# EAGLE board Main Board_backup (EAGLE 9.3.1)
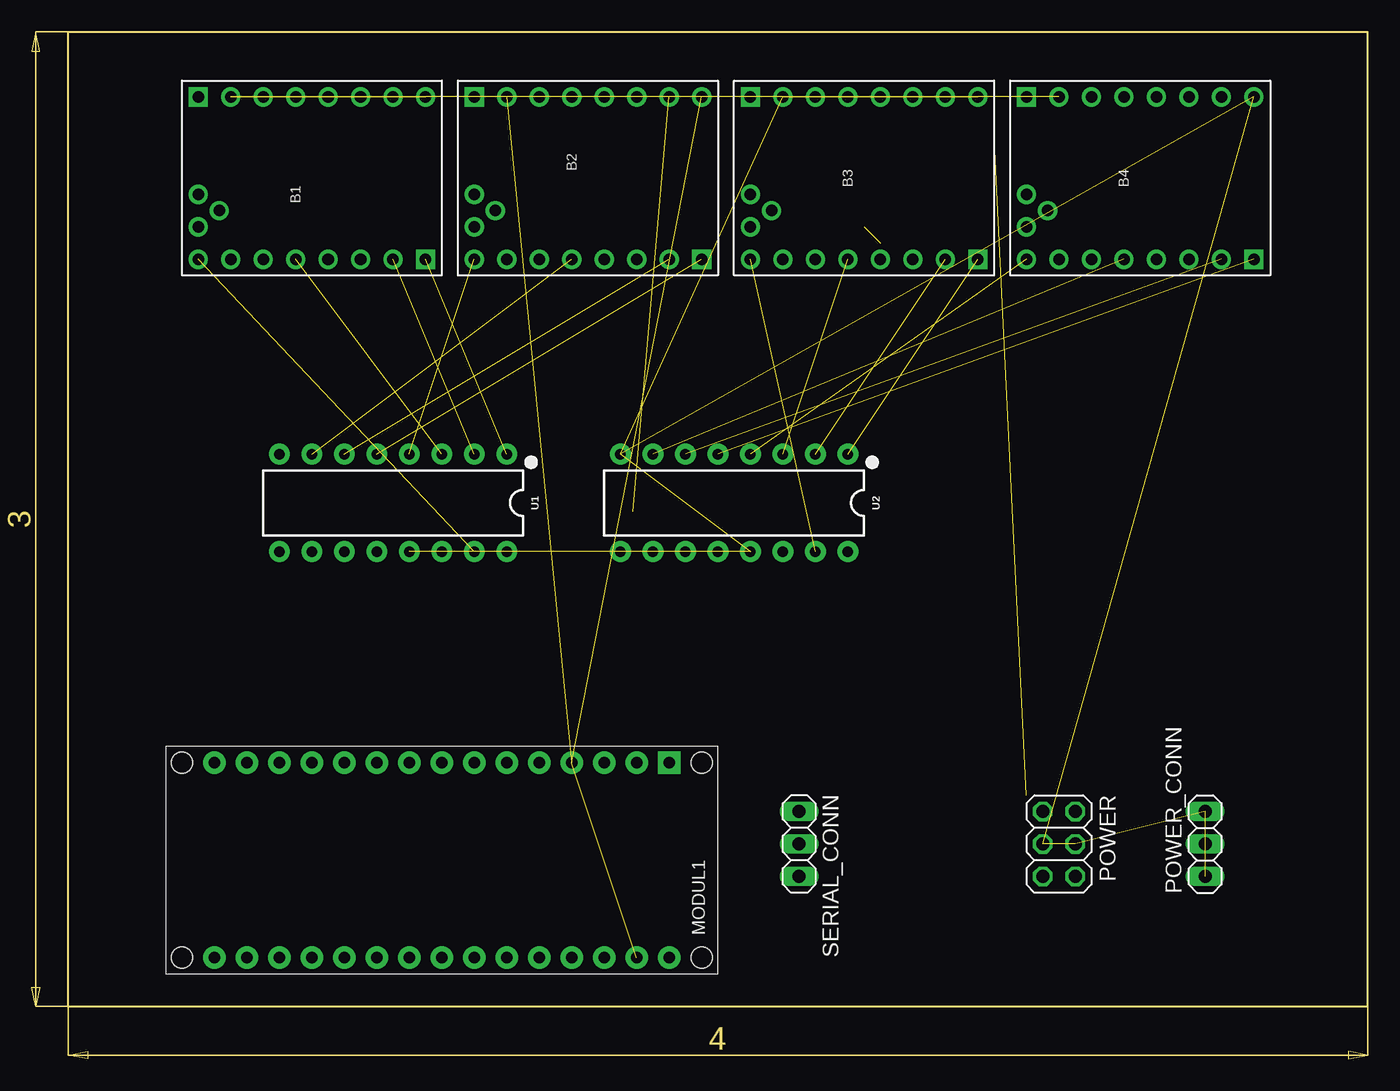
[diagram p0: board, top side]
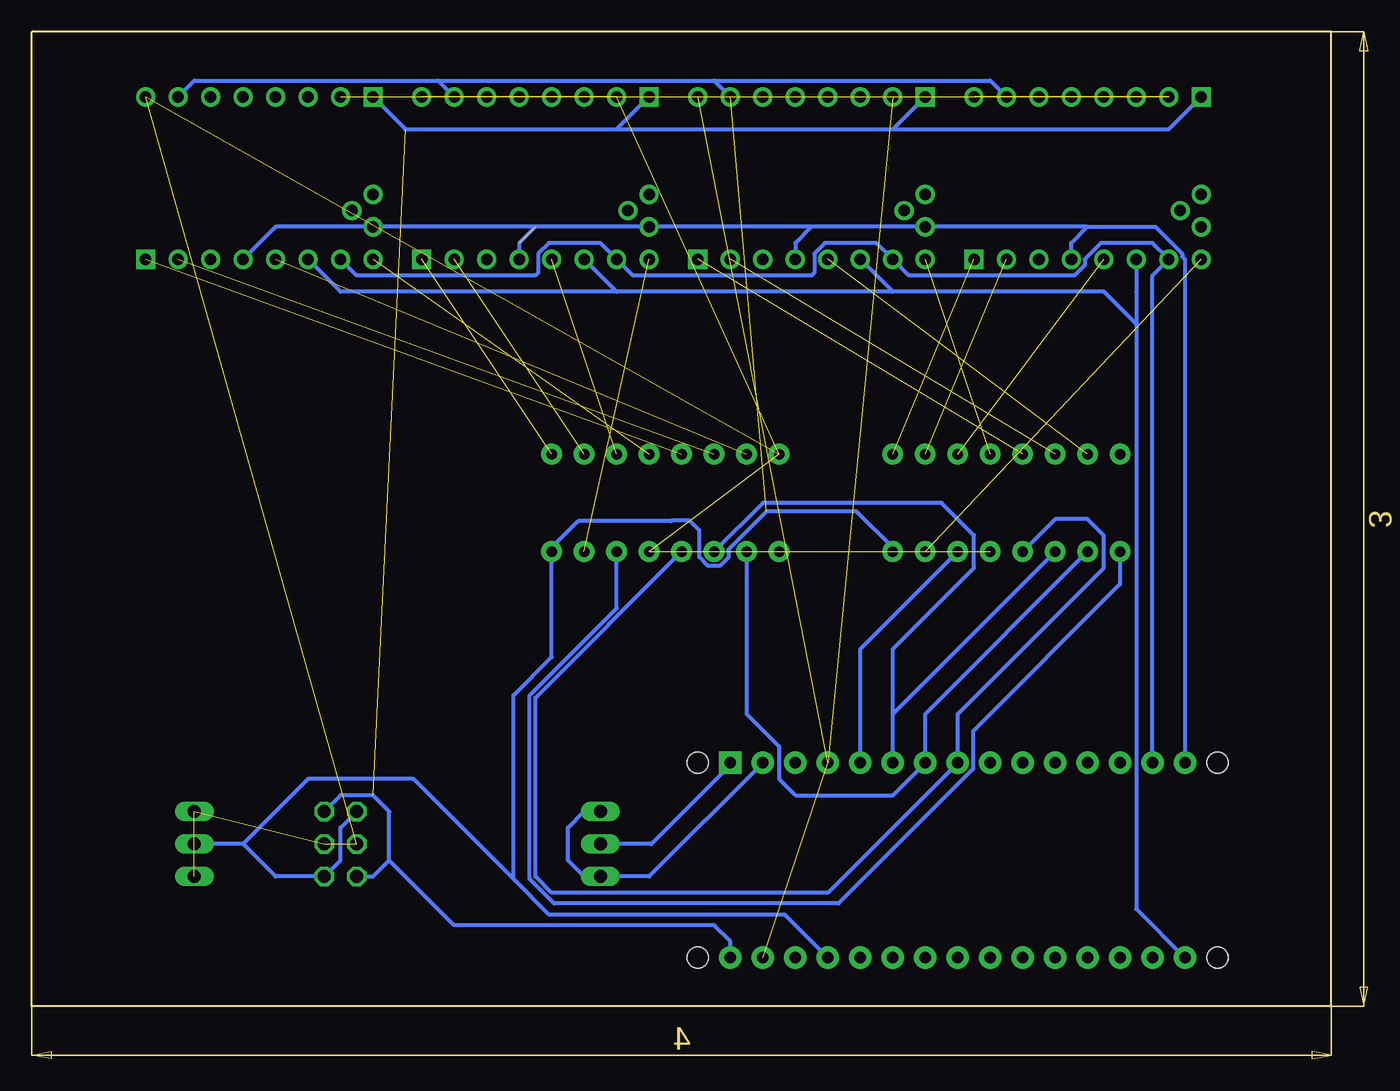
[diagram p1: board, bottom side, seen from below]

Size 101.6 x 76.2 mm. Coordinates in mm from the lower left corner, seen from the top.
Outline: 0,0 101.6,0 101.6,76.2 0,76.2 0,0
Copper layers (1*16): Top 0.035mm / dielectric 1.5mm / Bottom 0.035mm
Design rules "default": minimum track width 6mil, minimum drill 0.35mm, track to track 6mil, track to pad 6mil, pad to pad 6mil, via to via 6mil, smd to smd 6mil, copper to edge 40mil, drill to drill 6mil, minimum pad ring 10mil, minimum via ring 8mil, stop-mask expansion 4mil, vias tented up to drill 0mil, thermal gap 10mil

## Footprints (pad centres in the part's own frame; a part is rotated, then mirrored left to right if it is on the bottom)
STEPSTICK_TP = drill 0.9 pad 1.5: CFG1 -6.35,6.35; CFG2 -6.35,3.81; CFG3 -6.35,1.27; DIAG0 -2.54,7.239; DIAG1 -1.27,8.89; EN -6.35,8.89; GND@1 6.35,6.35; GND@2 6.35,-8.89; M1A 6.35,-1.27; M1B 6.35,-3.81; M2A 6.35,1.27; M2B 6.35,3.81; NC -6.35,-3.81; NC/CFG0 -6.35,-1.27; STEP -6.35,-6.35; VIO 6.35,-6.35; VREF -3.81,8.89 | drill 0.9 pad 1.5 square: DIR -6.35,-8.89; VM 6.35,8.89
ARDUINO_NANO2 = drill 0.914 pad 1.778 square: J1.1 -7.62,17.78 | drill 0.914 pad 1.778: J1.2 -7.62,15.24; J1.3 -7.62,12.7; J1.4 -7.62,10.16; J1.5 -7.62,7.62; J1.6 -7.62,5.08; J1.7 -7.62,2.54; J1.8 -7.62,0; J1.9 -7.62,-2.54; J1.10 -7.62,-5.08; J1.11 -7.62,-7.62; J1.12 -7.62,-10.16; J1.13 -7.62,-12.7; J1.14 -7.62,-15.24; J1.15 -7.62,-17.78; J2.1 7.62,17.78; J2.2 7.62,15.24; J2.3 7.62,12.7; J2.4 7.62,10.16; J2.5 7.62,7.62; J2.6 7.62,5.08; J2.7 7.62,2.54; J2.8 7.62,0; J2.9 7.62,-2.54; J2.10 7.62,-5.08; J2.11 7.62,-7.62; J2.12 7.62,-10.16; J2.13 7.62,-12.7; J2.14 7.62,-15.24; J2.15 7.62,-17.78 | hole 1.651: -7.62,-20.32; 7.62,-20.32; 7.62,20.32; -7.62,20.32
2X03 = drill 1.016 octagon: 1 -2.54,-1.27; 2 -2.54,1.27; 3 0,-1.27; 4 0,1.27; 5 2.54,-1.27; 6 2.54,1.27
1X03 = drill 1.016 long: 1 -2.54,0; 2 0,0; 3 2.54,0
DIP16 = drill 0.813 pad 1.626: 1 -8.89,-3.81; 2 -6.35,-3.81; 3 -3.81,-3.81; 4 -1.27,-3.81; 5 1.27,-3.81; 6 3.81,-3.81; 7 6.35,-3.81; 8 8.89,-3.81; 9 8.89,3.81; 10 6.35,3.81; 11 3.81,3.81; 12 1.27,3.81; 13 -1.27,3.81; 14 -3.81,3.81; 15 -6.35,3.81; 16 -8.89,3.81

## Placement (x,y rotation side)
B1  STEPSTICK-TP  [STEPSTICK_TP]  19.05,64.77 90 top
B2  STEPSTICK-TP  [STEPSTICK_TP]  40.64,64.77 90 top
B3  STEPSTICK-TP  [STEPSTICK_TP]  62.23,64.77 90 top
B4  STEPSTICK-TP  [STEPSTICK_TP]  83.82,64.77 90 top
MODUL1  ARDUINO_NANO2  [ARDUINO_NANO2]  29.21,11.43 270 top
POWER  [2X03]  77.47,12.7 270 top
POWER_CONN  [1X03]  88.9,12.7 90 top
SERIAL_CONN  [1X03]  57.15,12.7 270 top
U1  SN74HC595N  [DIP16]  25.4,39.37 180 top
U2  SN74HC595N  [DIP16]  52.07,39.37 180 top

## Library data of the parts
B1-B4 = we-board
MODUL1 = arduinoNano; ANZAHL: 2; MODUL: TRUE; STECKX0: -76200; STECKX1: 76200; STECKY0: 177800; STECKY1: 177800
POWER POWER_CONN SERIAL_CONN = pinhead
U1 U2 = SparkFun-IC-Logic; PROD_ID: IC-13123

## Nets
3V3: MODUL1.J2.14
+5V: B1.VIO B2.VIO B3.VIO B4.VIO MODUL1.J2.4 POWER.1 POWER.6 POWER_CONN.2 U1.16 U2.16
+12V: B1.VM B2.VM B3.VM B4.VM MODUL1.J2.1 POWER.2 POWER.5
AREF: MODUL1.J2.13
GND: B1.GND@1 B1.GND@2 B2.GND@1 B2.GND@2 B3.GND@1 B3.GND@2 B4.GND@1 B4.GND@2 MODUL1.J1.4 MODUL1.J2.2 POWER.3 POWER.4 POWER_CONN.1 POWER_CONN.3 U1.8 U1.13 U2.8 U2.13
MISO: B1.NC/CFG0 B2.NC/CFG0 B3.NC/CFG0 B4.NC/CFG0 MODUL1.J1.15
MOSI: B1.CFG1 B2.CFG1 B3.CFG1 B4.CFG1 MODUL1.J1.14
N$1: MODUL1.J1.1 SERIAL_CONN.2
N$2: U1.9 U2.14
N$3: B2.CFG3 U1.7
N$4: B2.STEP U1.6
N$5: B2.DIR U1.5
N$6: B2.EN U1.4
N$7: B1.CFG3 U1.3
N$8: B1.STEP U1.2
N$9: B1.DIR U1.1
N$10: B1.EN U1.15
N$11: B4.CFG3 U2.7
N$12: B4.STEP U2.6
N$13: B4.DIR U2.5
N$14: B4.EN U2.4
N$15: B3.CFG3 U2.3
N$16: B3.STEP U2.2
N$17: B3.DIR U2.1
N$18: B3.EN U2.15
N$22: MODUL1.J1.5 U1.14
N$27: MODUL1.J1.2 SERIAL_CONN.1 SERIAL_CONN.3
RCK: MODUL1.J1.8 U1.12 U2.12
SCK: B1.CFG2 B2.CFG2 B3.CFG2 B4.CFG2 MODUL1.J2.15
SCL: MODUL1.J1.7 U1.10 U2.10
SSCK: MODUL1.J1.6 U1.11 U2.11

## Tracks (layer width: path | path; a pad name or v marks a point on that pad's centre or on a via)
+5V  (1 unrouted)
  Bottom 0.305: 85.09,12.7 82.55,10.16 POWER.6 77.47,11.43 77.47,13.97 POWER.1 | 85.09,12.7 POWER_CONN.2 | MODUL1.J2.4 42.72,7.16 61.15,7.16 63.82,9.84 | 63.82,9.84 63.96,9.97 63.96,24.32 60.96,27.32 U2.16 60.96,35.87 58.88,37.95 51.61,37.95 51.58,37.97 50.16,37.97 49.4,37.21 49.4,35.12 48.72,34.44 | 48.26,34.44 47.8,34.44 47.14,35.1 47.14,35.72 44.15,38.71 37.13,38.71 34.29,35.87 U1.16 | 48.26,34.44 48.72,34.44 | B4.VIO 88.9,72.39 69.85,72.39 | 69.85,72.39 B3.VIO | 69.85,72.39 48.26,72.39 | 48.26,72.39 B2.VIO | 48.26,72.39 26.67,72.39 B1.VIO | 63.82,9.84 71.77,17.78 80.01,17.78 85.09,12.7 | 48.26,34.44 48.72,34.44
+12V  (1 unrouted)
  Bottom 0.305: POWER.5 74.93,10.16 73.66,11.43 | 73.66,11.43 73.66,15.24 74.93,16.51 77.47,16.51 POWER.2 | 50.12,6.35 50.8,6.35 | 50.8,6.35 68.58,6.35 73.66,11.43 | 55.88,68.58 72.39,68.58 B4.VM | 55.88,68.58 B3.VM | 55.88,68.58 34.29,68.58 | 34.29,68.58 B2.VM | 34.29,68.58 12.7,68.58 B1.VM | MODUL1.J2.1 46.99,5.08 48.26,6.35 50.8,6.35
GND  (17 unrouted)
MISO  (1 unrouted)
  Bottom 0.305: B1.NC/CFG0 20.32,59.69 19.05,60.96 | 19.05,60.96 13.75,60.96 11.64,58.86 11.64,58.63 11.43,58.42 MODUL1.J1.15 | 19.05,60.96 40.64,60.96 | B2.NC/CFG0 41.91,59.69 40.64,60.96 | 40.64,60.96 62.23,60.96 | 62.23,60.96 63.5,59.69 B3.NC/CFG0 | 62.23,60.96 82.55,60.96 B4.NC/CFG0
MOSI
  Bottom 0.305: MODUL1.J1.14 13.97,57.15 B1.CFG1 13.97,59.69 18,59.69 19.27,58.43 19.27,57.98 20.1,57.15 33.02,57.15 B2.CFG1 35.56,59.69 39.59,59.69 40.42,58.86 40.42,57.37 40.64,57.15 54.61,57.15 B3.CFG1 57.15,59.69 61.18,59.69 62.02,58.86 62.02,57.37 62.23,57.15 76.2,57.15 B4.CFG1
N$1
  Bottom 0.305: MODUL1.J1.1 47.61,18.43 47.61,18.26 53.17,12.7 SERIAL_CONN.2
N$2
  Bottom 0.305: U1.9 16.51,33.02 28.02,21.51 28.02,18.56 38.52,8.05 60.77,8.05 62.69,9.97 62.69,24.32 55.88,31.13 U2.14
N$3  (1 unrouted)
N$4  (1 unrouted)
N$5  (1 unrouted)
N$6  (1 unrouted)
N$7  (1 unrouted)
N$8  (1 unrouted)
N$9  (1 unrouted)
N$10  (1 unrouted)
N$11  (1 unrouted)
N$12  (1 unrouted)
N$13  (1 unrouted)
N$14  (1 unrouted)
N$15  (1 unrouted)
N$16  (1 unrouted)
N$17  (1 unrouted)
N$18  (1 unrouted)
N$22
  Bottom 0.305: MODUL1.J1.5 36.83,27.94 U1.14
N$27
  Bottom 0.305: SERIAL_CONN.1 58.42,15.24 59.69,13.97 59.69,11.43 58.42,10.16 SERIAL_CONN.3 53.34,10.16 MODUL1.J1.2
RCK
  Bottom 0.305: U1.12 21.59,38.1 19.05,38.1 17.78,36.83 17.78,34.29 29.21,22.86 MODUL1.J1.8 39.37,8.89 60.96,8.89 62.23,10.16 62.23,24.13 U2.12
SCK
  Bottom 0.305: B1.CFG2 15.24,55.88 15.24,53.34 | 15.24,53.34 15.24,7.62 MODUL1.J2.15 | 34.29,55.88 17.78,55.88 15.24,53.34 | 34.29,55.88 B2.CFG2 | 34.29,55.88 55.88,55.88 | 55.88,55.88 B3.CFG2 | 55.88,55.88 77.47,55.88 B4.CFG2
SCL
  Bottom 0.305: U1.10 31.75,22.86 MODUL1.J1.7 34.29,16.51 41.91,16.51 43.18,17.78 43.18,20.32 45.72,22.86 U2.10
SSCK
  Bottom 0.305: U1.11 34.29,22.86 MODUL1.J1.6 34.29,27.94 27.94,34.29 27.94,36.83 30.48,39.37 44.45,39.37 U2.11

## Text on the board
tSilk: USB